# Allegro board FINALPRO.brd
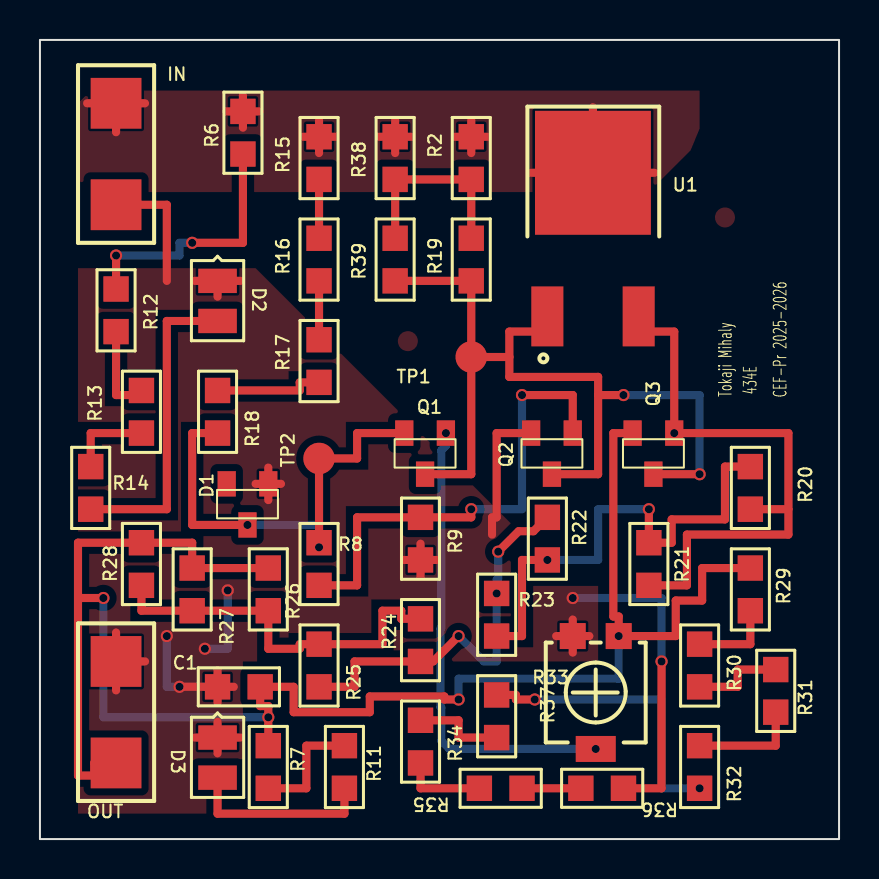
[diagram p0: board, top side]
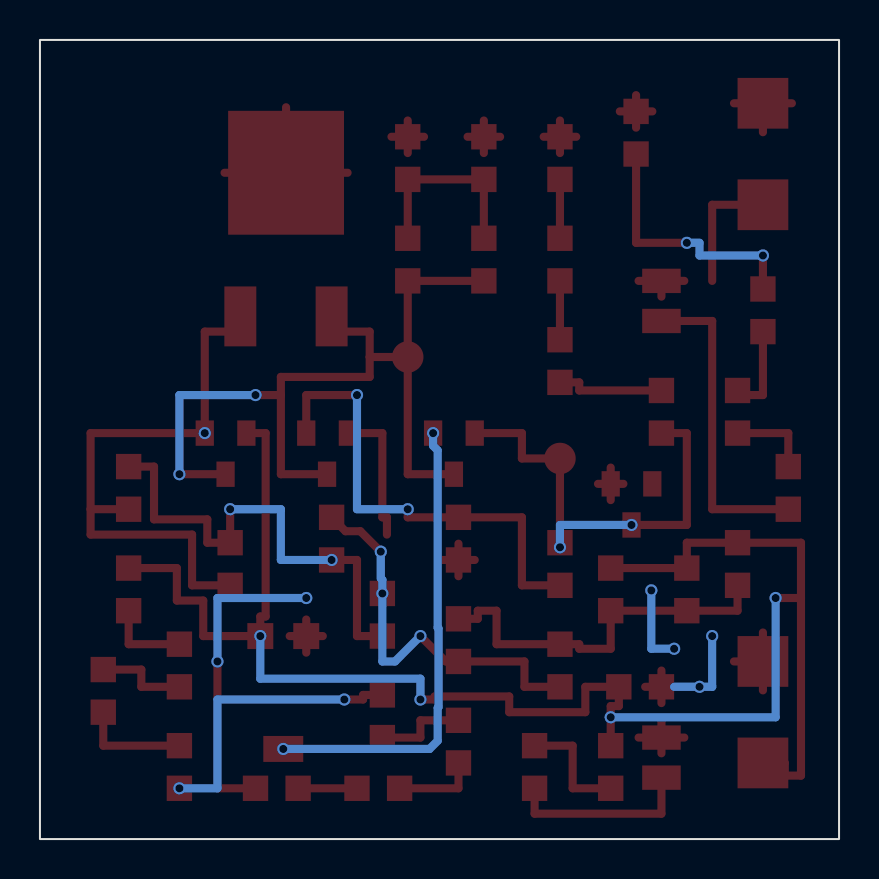
[diagram p1: board, bottom side, seen from below]

Outline 40 x 40 mm; copper layers: TOP, BOTTOM. Coordinates in mm from the lower left corner of the outline.
Outline path: rectangle 0,0 40,40

## Design rules (mm)
constraint set DEFAULT: min track width 0.406

## Placement (name value [footprint] x y rotation side)
C1  10u  [SMC0805]  8.89 7.62 0 top
CON1  Con_2  [PINS_PACK]  3.81 36.83 270 top
CON2  Con_2  [PINS_PACK]  3.81 3.81 90 top
D1  ZENER  [TO236AA]  11.43 17.78 90 top
D2  5V,LED,LED  [SMD0805]  8.89 27.94 270 top
D3  5V,LED,LED  [SMD0805]  8.89 5.08 270 top
NOREF  -  []  -0.05 40.82 0 top
NOREF#2  -  []  40 0 90 top
Q1  QBC846B  [TO236AA]  20.32 20.32 90 top
Q2  QBC846B  [TO236AA]  26.67 20.32 90 top
Q3  QBC846B  [TO236AA]  31.75 20.32 90 top
R2  10k  [SMR0805]  21.59 33.02 90 top
R6  1.5k  [SMR0805]  10.16 34.29 90 top
R7  1.5k  [SMR0805]  11.43 2.54 90 top
R8  5.6k  [SMR0805]  13.97 12.7 90 top
R9  510  [SMR0805]  19.05 13.97 90 top
R11  1.5k  [SMR0805]  15.24 2.54 90 top
R12  1.5k  [SMR0805]  3.81 25.4 90 top
R13  1.5k  [SMR0805]  5.08 20.32 90 top
R14  1.5k  [SMR0805]  2.54 16.51 90 top
R15  1.5k  [SMR0805]  13.97 33.02 90 top
R16  1.5k  [SMR0805]  13.97 27.94 90 top
R17  1.5k  [SMR0805]  13.97 22.86 90 top
R18  1.5k  [SMR0805]  8.89 20.32 90 top
R19  10k  [SMR0805]  21.59 27.94 90 top
R20  1  [SMR0805]  35.56 16.51 90 top
R21  1  [SMR0805]  30.48 12.7 90 top
R22  1  [SMR0805]  25.4 13.97 90 top
R23  1  [SMR0805]  22.86 10.16 90 top
R24  0.47  [SMR0805]  19.05 8.89 90 top
R25  0.47  [SMR0805]  13.97 7.62 90 top
R26  0.47  [SMR0805]  11.43 11.43 90 top
R27  0.47  [SMR0805]  7.62 11.43 90 top
R28  0.47  [SMR0805]  5.08 12.7 90 top
R29  150  [SMR0805]  35.56 11.43 90 top
R30  150  [SMR0805]  33.02 7.62 90 top
R31  150  [SMR0805]  36.83 6.35 90 top
R32  150  [SMR0805]  33.02 2.54 90 top
R33  150  [SMR0805]  22.86 5.08 90 top
R34  150  [SMR0805]  19.05 3.81 90 top
R35  150  [SMR0805]  24.13 2.54 180 top
R36  33  [SMR0805]  29.21 2.54 180 top
R37  5k  [TS53YL]  26.67 10.16 90 top
R38  10k  [SMR0805]  17.78 33.02 90 top
R39  10k  [SMR0805]  17.78 27.94 90 top
TP1  T POINT A  [TP1]  21.59 24.13 90 top
TP2  T POINT A  [TP1]  13.97 19.05 90 top
U1  IRFRU120N  [DPACK]  25.4 26.16 0 top

## Library data of the parts
C1 = C
CON1 CON2 = Con_2
D1 = zener_0
D2 = LED_1
D3 = LED_2
Q1-Q3 = QBC846B_1
R2 R6-R9 R11-R36 R38 R39 = R
R37 = POT
TP1 TP2 = T POINT A
U1 = IRFRU120N_1

## Footprints (pads in the part's own frame, mm; a bottom-side part is the same pattern mirrored in y, then rotated)
DPACK
  rect 1.6x3 smd: 1(0,0) 3(4.57,0)
  rect 5.8x6.2 smd: 2(2.28,7.19)
PINS_PACK
  rect 2.54x2.54 smd: 1(0,0) 2(5.08,0)
SMC0805
  rect 1.27x1.27 smd: 1(0,0) 2(2.134,0)
SMD0805
  rect 1.219x1.93 smd: A(2.007,0) C(0,0)
SMR0805
  rect 1.27x1.27 smd: 1(0,0) 2(2.134,0)
TO236AA
  rect 1.27x0.914 smd: 1(0,0) 2(0,2.083) 3(-2.057,1.041)
TP1
  round 1.575 smd: 1(0,0)
TS53YL
  rect 1.3x1.3 smd: 1(0,0) 3(0,-2.3)
  rect 1.3x2 smd: 2(-5.65,-1.15)

## Nets
0: C1.1 CON1.2 CON2.2 D1.1 D2.C(2) D3.C(2) Q2.2(E) R9.1 R36.1 R37.1
DRAIN: CON1.1 R2.2 R6.2 R15.2 R38.2 U1.2
GATE: Q1.3 Q2.3 Q3.3 R19.1 R39.1 TP1.1(TP) U1.1
OUT: C1.2 CON2.1 Q3.2(E) R7.2 R26.2 R27.2 R28.2 R29.2 R37.3
REF: D1.3 Q1.2(E) R8.2 R18.1 TP2.1(TP)
SOURCE: Q3.1 R20.1 R21.1 U1.3
N08609: R20.2 R21.2 R22.1 R23.1
N08615: R22.2 R23.2 R24.1 R25.1
N08621: R24.2 R25.2 R26.1 R27.1 R28.1
N09289: D3.A R11.1
N09467: D2.A R14.1
N09611: Q2.1 R8.1 R9.2
N10869: Q1.1 R37.2(T)
N20460: R2.1 R19.2 R38.1 R39.2
N089091: R15.1 R16.2
N089371: R29.1 R30.2
N089591: R6.1 R12.2
N090471: R7.1 R11.2
N090691: R16.1 R17.2
N090891: R30.1 R31.2
N091111: R12.1 R13.2
N092071: R17.1 R18.2
N092311: R31.1 R32.2
N092531: R13.1 R14.2
N093611: R32.1 R33.2
N095231: R33.1 R34.2
N096531: R34.1 R35.2
N096911: R35.1 R36.2

Pads without a net: D1 2

## Via types
v1: diameter 0.61, hole 0.406, TOP to BOTTOM, 28 vias

## Routing (per net, layer and track width the routed paths; a pad name or vN(x,y) marks a point on that pad's centre or on a via; arc(x,y) is an arc through that point)
0: length 62.9
  TOP w0.406: v1(6.99,7.62) C1.1 ; C1.1 9.7,7.62 ; C1.1 8.89,6.81 ; C1.1 8.89,8.43 ; 8.89,27.15 D2.C ; D2.C 10.03,27.94 ; D2.C 7.75,27.94 ; 19.05,13.16 R9.1 ; R9.1 19.05,14.78 ; R9.1 19.86,13.97 ; R9.1 18.24,13.97 ; CON2.2 3.81,10.34 ; CON2.2 3.81,7.44 ; CON2.2 5.26,8.89 ; D1.1 11.43,18.59 ; D1.1 10.79,17.78 ; D1.1 11.43,16.97 ; D1.1 12.07,17.78 ; 7.75,5.08 D3.C ; D3.C 8.89,4.29 ; D3.C 8.89,5.87 ; D3.C 10.03,5.08 ; CON1.2 6.35,31.75 6.35,27.94 ; 22.63,15.24 22.63,16.1 22.86,16.1 22.86,20.32 Q2.2 ; R37.1 27.5,10.16 ; R37.1 26.67,10.99 ; R37.1 26.67,9.33 ; R37.1 25.84,10.16 ; R36.1 31.11,2.54 v1(31.11,8.89)
  BOTTOM w0.406: 8.26,7.62 v1(6.99,7.62) 6.35,7.62 v1(6.35,10.16) ; v1(8.26,9.53) 9.4,9.53 v1(9.4,12.45) ; v1(31.11,8.89) 31.11,12.06 v1(26.67,12.06)
DRAIN: length 26.8
  TOP w0.406: 3.81,35.38 CON1.1 ; CON1.1 5.26,36.83 ; CON1.1 2.36,36.83 ; 24.6,33.35 U1.2 ; U1.2 30.76,33.35 ; U1.2 27.68,36.63 ; 21.59,34.34 R2.2 ; R2.2 20.78,35.15 ; R2.2 22.4,35.15 ; R2.2 21.59,35.97 ; R6.2 10.97,36.42 ; R6.2 10.16,35.61 ; R6.2 9.35,36.42 ; R6.2 10.16,37.24 ; 13.97,34.34 R15.2 ; R15.2 13.97,35.97 ; R15.2 14.78,35.15 ; R15.2 13.16,35.15 ; R38.2 17.78,35.97 ; R38.2 17.78,34.34 ; R38.2 18.59,35.15 ; R38.2 16.97,35.15
GATE: length 45.6
  TOP w0.406: 27.94,22.23 27.94,18.26 Q2.3 ; 27.94,22.23 27.94,23.13 23.5,23.13 23.5,24.13 ; 27.94,22.23 v1(29.21,22.23) ; Q1.3 21.59,18.26 TP1.1 ; TP1.1 R19.1 R39.1 ; TP1.1 23.5,24.13 ; U1.1 25.4,25.4 23.5,25.4 23.5,24.13 ; Q3.3 v1(33.02,18.26)
  BOTTOM w0.406: v1(33.02,18.26) 33.02,22.23 v1(29.21,22.23)
OUT: length 88.6
  TOP w0.406: R7.2 v1(11.43,6.1) 11.43,6.65 11.02,6.65 C1.2 12.7,7.62 12.7,6.35 16.51,6.35 16.51,7.14 20.24,7.14 20.24,6.99 v1(20.95,6.99) ; 1.91,12.06 1.91,14.83 R28.2 7.62,14.83 R27.2 R26.2 ; 1.91,12.06 1.91,3.17 2.72,3.17 2.72,3.81 CON2.1 ; 1.91,12.06 v1(3.17,12.06) ; Q3.2 28.7,20.32 28.7,11.14 28.97,11.14 v1(28.97,10.16) 31.83,10.16 31.83,11.94 33.15,11.94 33.15,13.56 R29.2
  BOTTOM w0.406: v1(28.97,10.16) 28.97,8.03 20.95,8.03 v1(20.95,6.99) ; v1(3.17,12.06) 3.17,6.1 v1(11.43,6.1)
REF: length 23.1
  TOP w0.406: R8.2 TP2.1 15.88,19.05 15.88,20.32 Q1.2 ; v1(10.39,15.72) 7.62,15.72 7.62,20.32 R18.1
  BOTTOM w0.406: v1(13.97,14.61) 13.97,15.72 v1(10.39,15.72)
SOURCE: length 29.8
  TOP w0.406: 37.47,16.51 37.47,15.24 32.38,15.24 32.38,12.7 R21.1 ; 37.47,16.51 37.47,20.32 v1(31.75,20.32) 31.75,25.4 29.97,25.4 U1.3 ; 37.47,16.51 R20.1
N08609: length 24.5
  TOP w0.406: v1(25.4,13.97) 24.13,13.97 24.13,10.16 R23.1 ; v1(30.48,16.51) R21.2 31.62,14.83 31.62,16 34.29,16 34.29,18.64 R20.2
  BOTTOM w0.406: v1(25.4,13.97) 27.94,13.97 27.94,16.51 v1(30.48,16.51)
N08615: length 19.9
  TOP w0.406: R25.1 15.75,7.62 15.75,8.89 R24.1 19.68,8.89 v1(20.95,10.16) ; v1(22.94,14.39) 23.96,15.41 24.7,15.41 R22.2
  BOTTOM w0.406: v1(22.94,14.39) 22.94,13.05 22.86,12.97 v1(22.86,12.29) 22.86,8.89 22.23,8.89 v1(20.95,10.16)
N08621: length 19.5
  TOP w0.406: R28.1 5.08,11.43 R27.1 R26.1 11.43,9.53 13,9.53 13,9.75 R25.2 17.14,9.75 17.14,11.43 18.08,11.43 18.08,11.02 R24.2
N09289: length 9.4
  TOP w0.406: R11.1 15.24,1.27 8.89,1.27 D3.A
N09467: length 15.8
  TOP w0.406: R14.1 6.35,16.51 6.35,25.93 D2.A
N09611: length 24.1
  TOP w0.406: v1(24.13,22.23) 26.67,22.23 Q2.1 ; R8.1 15.88,12.7 15.88,16.1 R9.2 21.59,16.1 v1(21.59,16.51)
  BOTTOM w0.406: v1(21.59,16.51) 24.13,16.51 v1(24.13,22.23)
N10869: length 23.4
  BOTTOM w0.406: v1(20.32,20.32) 20.32,19.68 20.09,19.46 20.09,10.58 20.05,10.54 20.05,6.61 20.09,6.56 20.09,4.92 20.5,4.51 v1(27.82,4.51)
N20460: length 9.7
  TOP w0.406: R19.2 R2.1 R38.1 R39.2
N089091: length 2.9
  TOP w0.406: R15.1 R16.2
N089371: length 4.2
  TOP w0.406: R30.2 35.56,9.75 R29.1
N089591: length 13.1
  TOP w0.406: R6.1 10.16,29.84 v1(7.62,29.84) ; v1(3.81,29.21) R12.2
  BOTTOM w0.406: v1(7.62,29.84) 6.99,29.84 6.99,29.21 v1(3.81,29.21)
N090471: length 5.9
  TOP w0.406: R7.1 13.34,2.54 13.34,4.67 R11.2
N090691: length 2.9
  TOP w0.406: R16.1 R17.2
N090891: length 4.7
  TOP w0.406: R31.2 34.92,8.48 34.92,7.62 R30.1
N091111: length 4.7
  TOP w0.406: R13.2 5.08,22.23 3.81,22.23 R12.1
N092071: length 5.5
  TOP w0.406: R17.1 13,22.86 13,22.45 R18.2
N092311: length 5.5
  TOP w0.406: R31.1 36.83,4.67 R32.2
N092531: length 4.2
  TOP w0.406: R13.1 2.54,20.32 R14.2
N093611: length 14.8
  TOP w0.406: R33.2 23.83,7.21 23.83,6.99 v1(24.77,6.99)
  BOTTOM w0.406: v1(24.77,6.99) 31.11,6.99 31.11,2.54 v1(33.02,2.54)
N095231: length 4.7
  TOP w0.406: R33.1 20.95,5.08 20.95,5.94 R34.2
N096531: length 4.2
  TOP w0.406: R35.2 19.05,2.54 R34.1
N096911: length 2.9
  TOP w0.406: R35.1 R36.2

## Copper pours and planes (outline as drawn; the poured copper is in the pictures)
0 on TOP: 1.91,28.57 10.79,28.57 24.77,14.61 24.77,12.67 27.94,12.67 27.94,8.89 10.16,8.89 10.16,1.27 1.91,1.27
DRAIN on TOP: 2.54,37.47 33.02,37.47 33.02,35.56 32.57,34.48 30.48,32.38 2.54,32.38 1.91,33.02 1.91,36.83
Net_1 on TOP: 17.92,24.92 18.92,24.92
Net_2 on TOP: 33.79,31.11 34.79,31.11

## Text on the board
Ref Des/Silkscreen Top: Tokaji Mihaly | 434E | CEF-Pr 2025-2026 | OUT | IN | R28
XSECTION_CHART: *  SURFACE | L1 TOP CONDUCTOR | *  DIELECTRIC | L2 BOTTOM CONDUCTOR | DESIGN CROSS SECTION CHART | ___________________________ | TOTAL THICKNESS 62.992 MIL | 1-2
NCLEGEND-1-2: FIGURE | FINISHED_SIZE | 16.0 | DRILL CHART: TOP to BOTTOM | ALL UNITS ARE IN MILS | PLATED | QTY | 29
